# Altium PCB NPU_project.PcbDoc
Units mil, origin at the board's own origin, x right, y up, seen from the top; angles counter-clockwise.
Board outline 4675 x 3440 mil, 2 copper layers (Top Layer, Bottom Layer); 41 components, 47 nets, 171 pads, 58 vias.
Unrouted connection lines stored in the file: 6.
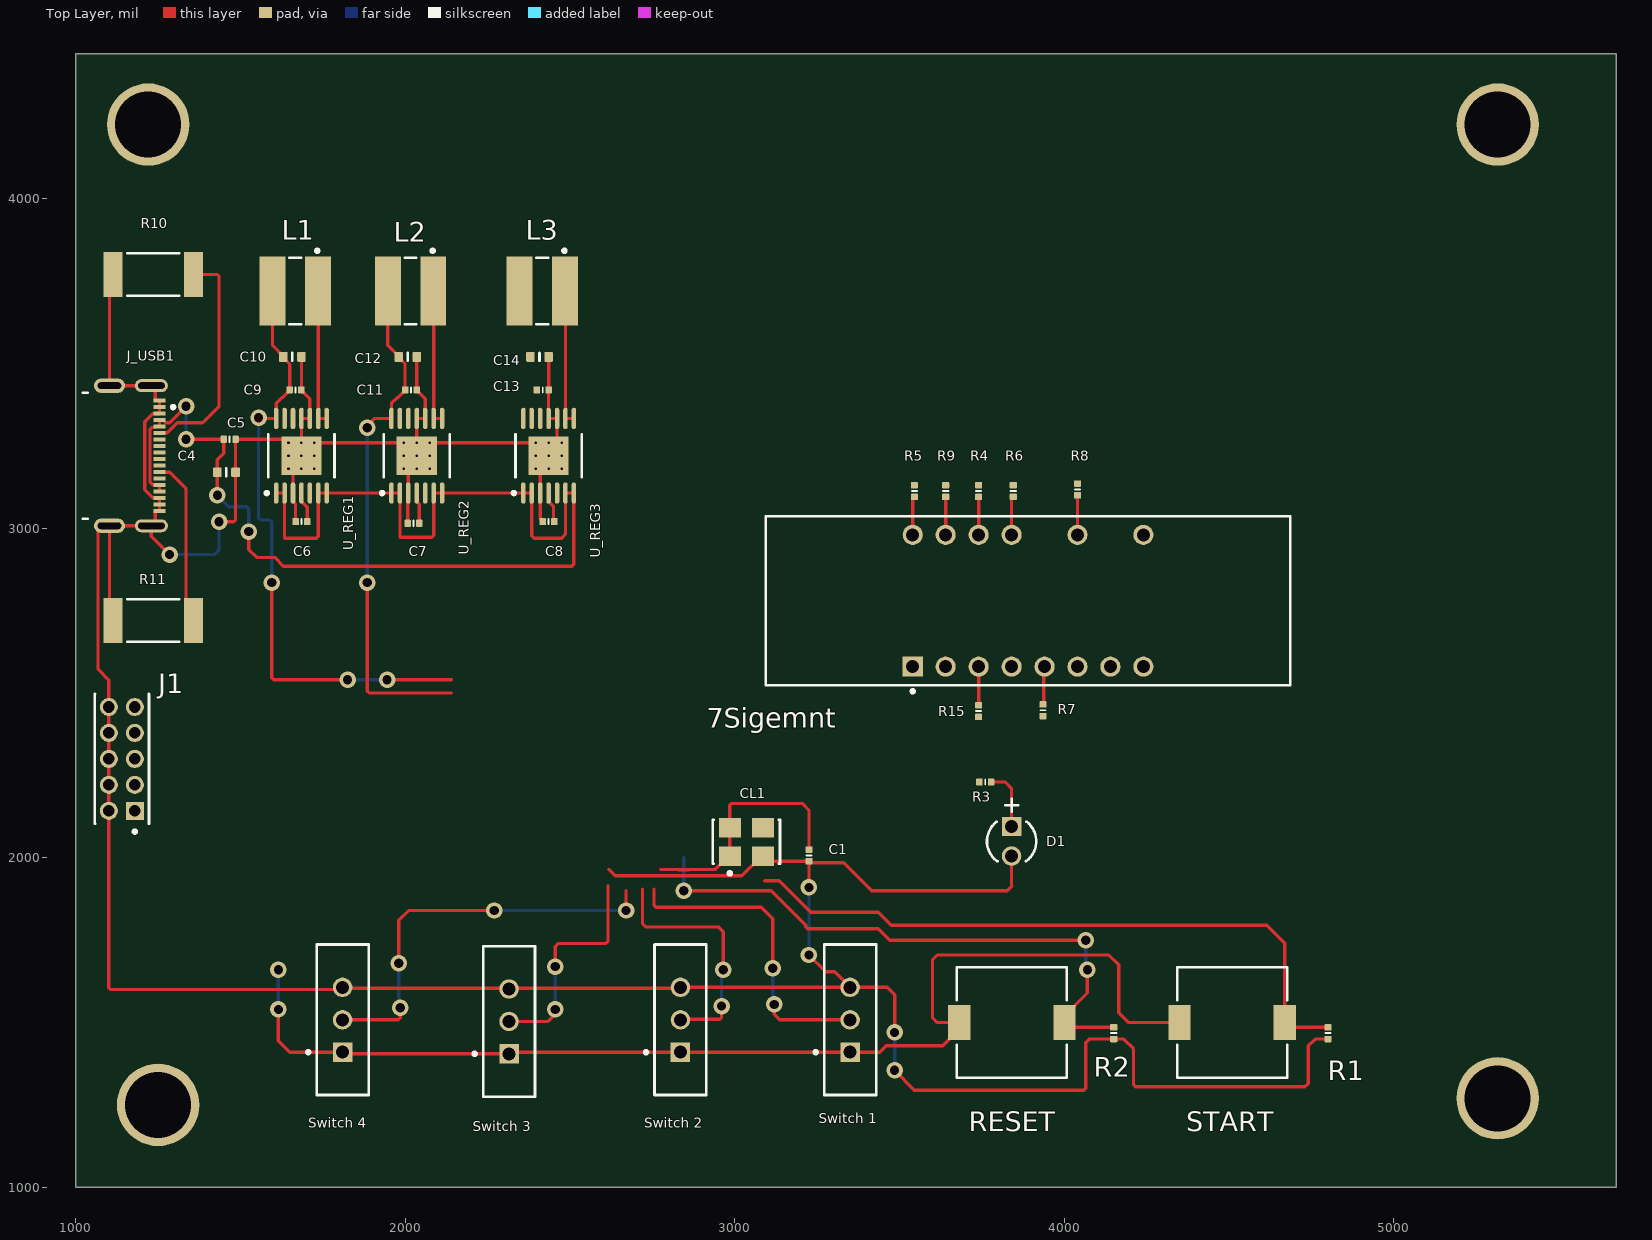
[diagram p0: Top Layer view]
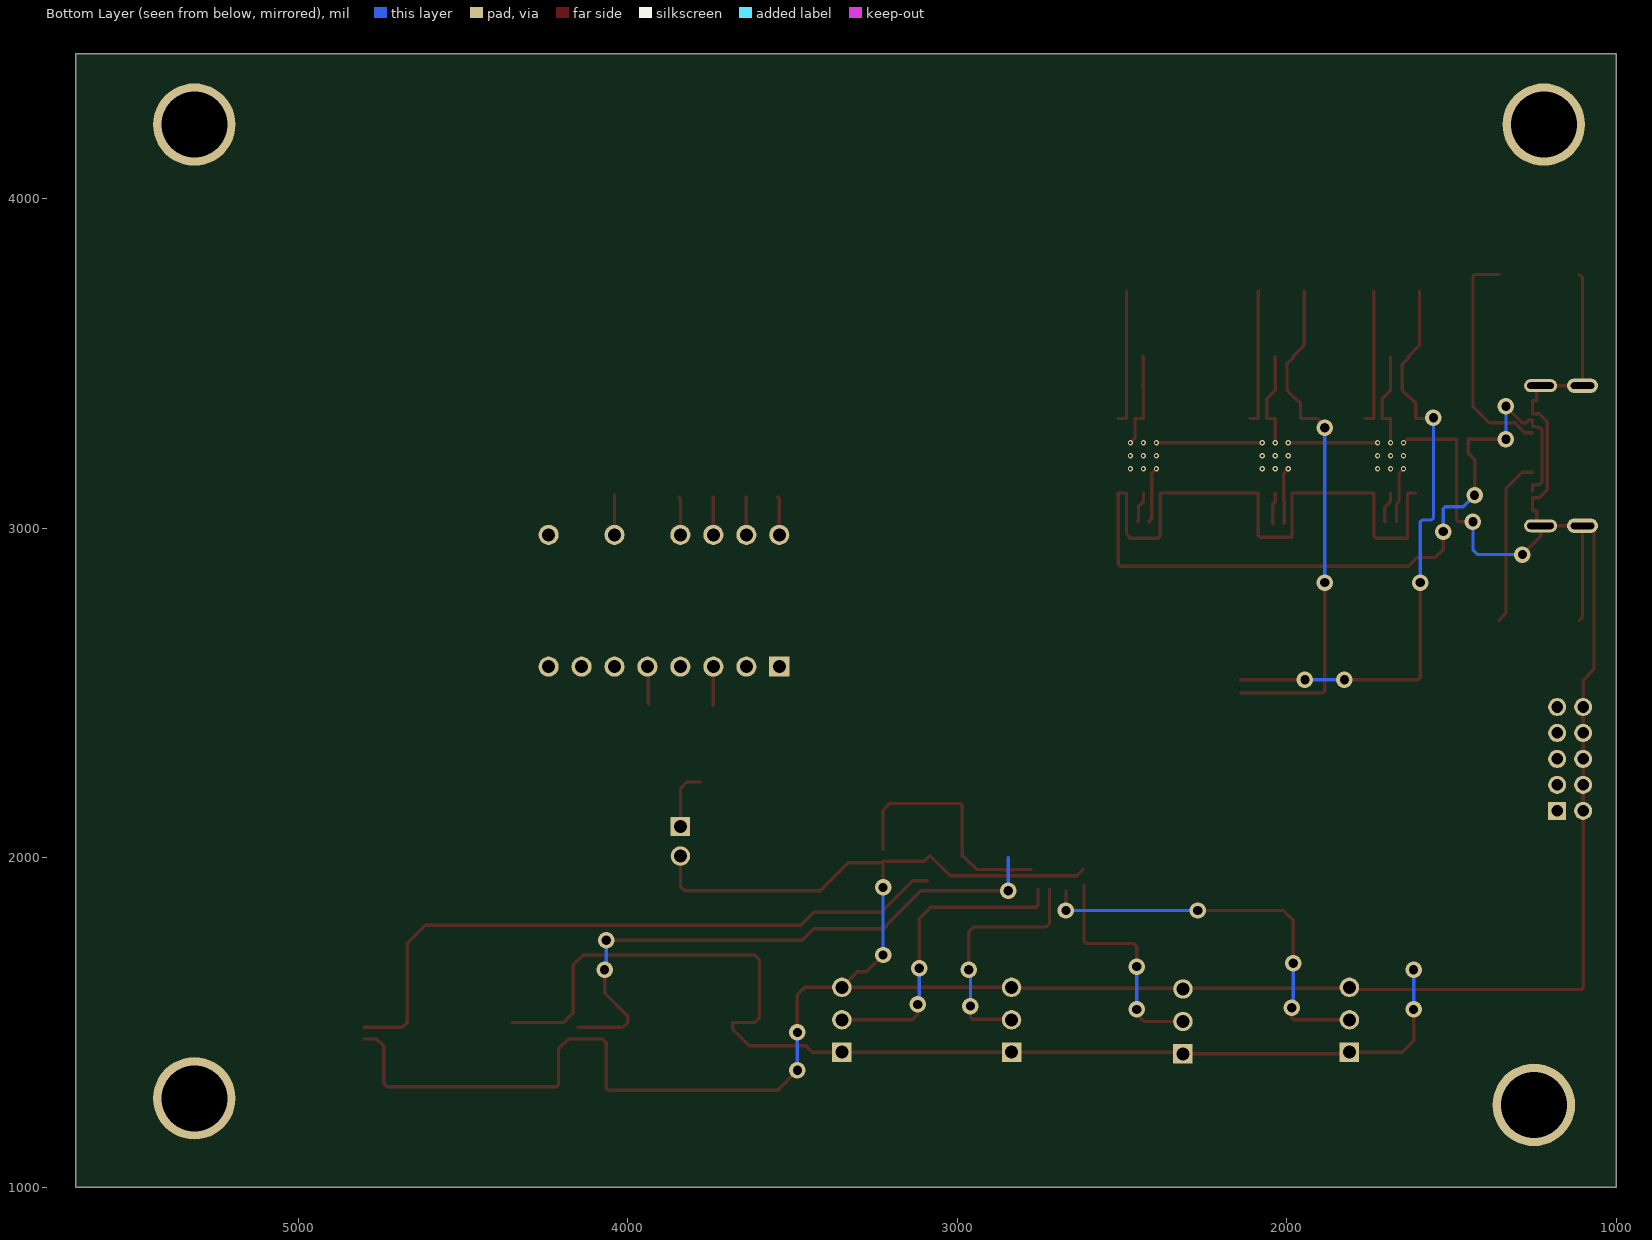
[diagram p1: Bottom Layer view, seen from below]
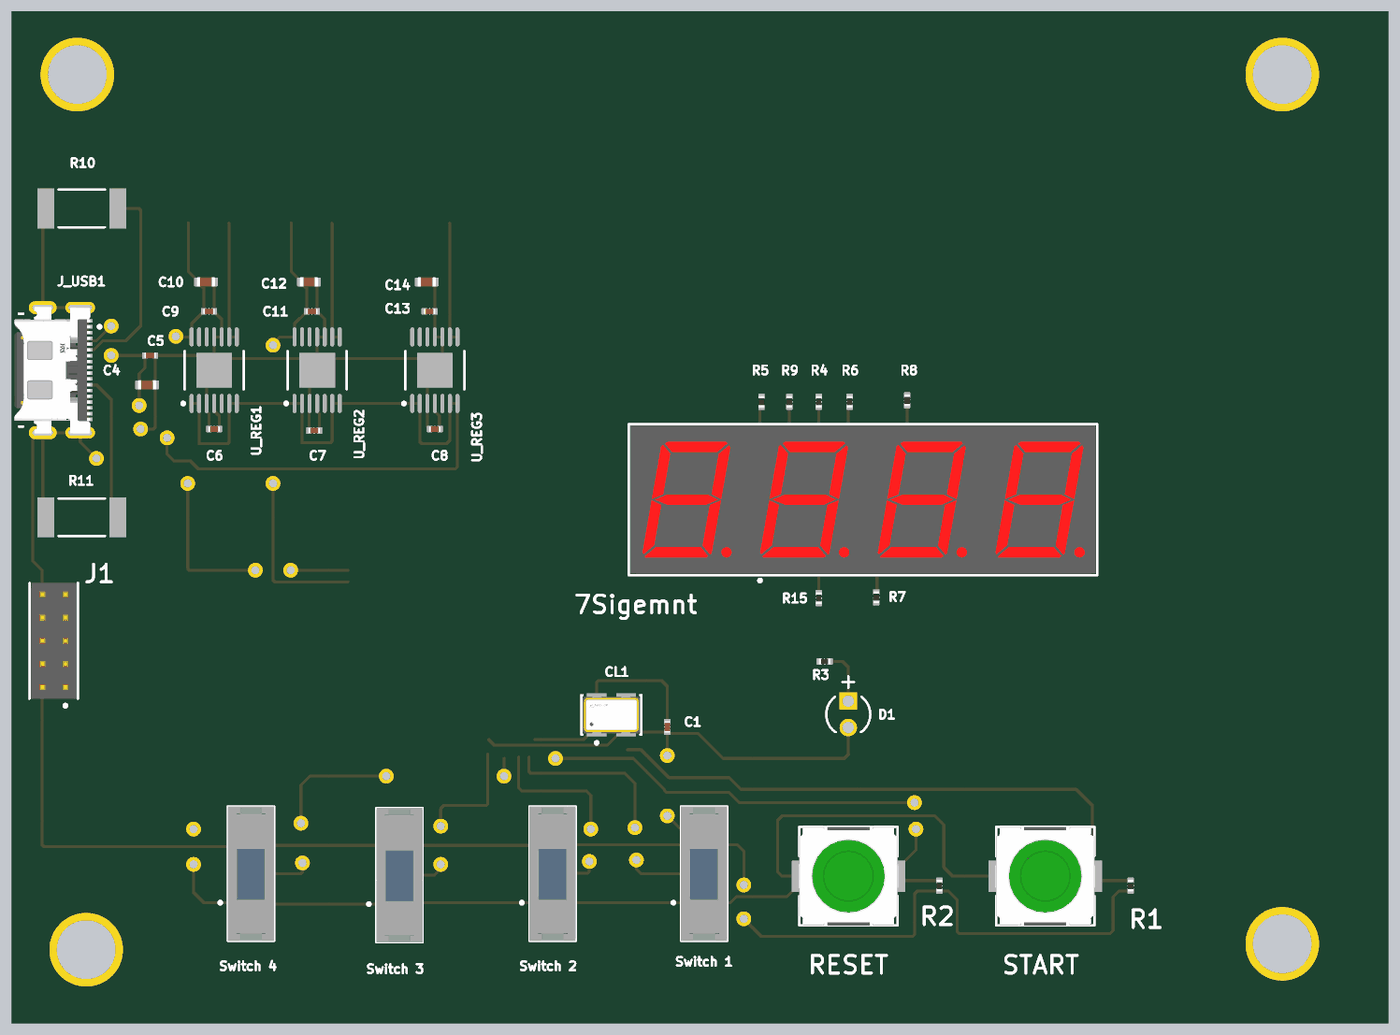
[diagram p2: 3D render of the assembled board from above, using the file's embedded part models]

## Layer stack, top to bottom
Top Solder: solder mask 0.4, Solder Resist, Dk 3.5
Top Layer: signal copper 1.4
Dielectric 1: dielectric 12.6, FR-4, Dk 4.8
Bottom Layer: signal copper 1.4
Bottom Solder: solder mask 0.4, Solder Resist, Dk 3.5

## Board outline
1000,1000 5675,1000 5675,4440 1000,4440

## Design rules (kind name [scope] priority, off if disabled: settings)
Clearance [All] p1: gap=6 ignorepadtopadclearanceinfootprint=TRUE
FanoutControl Fanout_BGA [IsBGA] p1: bgadir=Out bgaviamode=Centered fanoutstyle=BGA fanoutdirection=Alternating viagrid=1 // Fanout_BGA (Default Rule)
MinimumSolderMaskSliver [All] p1 off: minsoldermaskwidth=10
PolygonConnect [All] p1: connectstyle=Relief reliefconductorwidth=10 reliefentries=4 polygonreliefangle="90 Angle" airgapwidth=10
RoutingVias [All] p1: holewidth=28 width=50 viastyle="Through Hole" minholewidth=28 minwidth=50 maxholewidth=28 maxwidth=50
SilkToSolderMaskClearance [IsPad] p1 off: minsilkscreentomaskgap=10 clearancetoexposedcopper=TRUE
SolderMaskExpansion [All] p1: expansion=0 istentingtop=FALSE
SupplyNets "Schematic Supply Nets_4" [InNet('+3V3')] p1: voltage=0.000
SupplyNets "Schematic Supply Nets_3" [InNet('GND')] p2: voltage=0.000
SupplyNets "Schematic Supply Nets_2" [InNet('+1V8')] p3: voltage=0.000
SupplyNets "Schematic Supply Nets_1" [InNet('+1V0')] p4: voltage=0.000
SupplyNets "Schematic Supply Nets" [InNet('+5V_IN')] p5: voltage=0.000
Width [All] p1 off: maxlimit=10 minlimit=10 preferedwidth=10
27 further rules are at their usual default settings.

## Classes and differential pairs
component class PowerSupply: 2 C4 C5 C6 C7 C8 C9 C10 C11 C12 C14 J_USB1 L1 L2 L3 R10 U_REG1 U_REG2 U_REG3
component class JTAG: J1
component class InputOutput: 7Sigemnt D1 R1 R2 R3 R4 R5 R6 R7 R8 R9 R15 RESET START "Switch 1" "Switch 2" "Switch 3" "Switch 4"
component class Clock: C1 CL1

## Components (designator, comment, footprint, x,y, rotation, side; value= is the part's Value field where it differs from the comment)
7Sigemnt "LTC-4627G" FP-LTC-4627G-MFG 3890,2780 r0 top
C1 "Capacitor 100nF +/-20% 50V 0402" CAPC0402(1005)60_L 3225,2007.28 r90 top value=100nF (schematic designator С1)
C4 "Capacitor 10µF +/-20% 10V 0603" CAPC0603(1608)100_L 1457.44,3170 r0 top value=10µF (schematic designator С4)
C5 "Capacitor 100nF +/-20% 50V 0402" CAPC0402(1005)60_L 1467.28,3270 r0 top value=100nF (schematic designator С5)
C6 "Capacitor 100nF +/-20% 50V 0402" CAPC0402(1005)60_L 1685,3020 r0 top value=100nF (schematic designator С6)
C7 "Capacitor 100nF +/-20% 50V 0402" CAPC0402(1005)60_L 2025,3015 r0 top value=100nF (schematic designator С7)
C8 "Capacitor 100nF +/-20% 50V 0402" CAPC0402(1005)60_L 2435,3020 r0 top value=100nF (schematic designator С8)
C9 "Capacitor 100nF +/-20% 50V 0402" CAPC0402(1005)60_L 1667.28,3420 r0 top value=100nF (schematic designator С9)
C10 "Capacitor 10µF +/-20% 10V 0603" CAPC0603(1608)100_L 1657.44,3520 r0 top value=10µF (schematic designator С10)
C11 "Capacitor 100nF +/-20% 50V 0402" CAPC0402(1005)60_L 2017.28,3420 r0 top value=100nF
C12 "Capacitor 10µF +/-20% 10V 0603" CAPC0603(1608)100_L 2007.44,3520 r0 top value=10µF
C13 "Capacitor 100nF +/-20% 50V 0402" CAPC0402(1005)60_L 2417.28,3420 r0 top value=100nF
C14 "Capacitor 10µF +/-20% 10V 0603" CAPC0603(1608)100_L 2407.56,3520 r0 top value=10µF
CL1 "ASFL1-100.000MHZ-EC-T" FP-ASFL1-MFG 3035,2048.31 r0 top (schematic designator Clock)
D1 "304090040" LED-2P-2.28-3MM 3840,2050 r270 top (schematic designator Diode)
J1 "TMM-105-01-L-D" FP-TMM-105-01-L-D-MFG 1140,2300 r90 top
J_USB1 "CX90M-16P" FP-CX90M-16P-MFG 1135,3220 r270 top
L1 "74408941010" WE-SPC_4818 51666.1,-46280 r270 top
L2 "74408941010" WE-SPC_4818 52016.1,-46280 r270 top
L3 "74408941010" WE-SPC_4818 52416.1,-46280 r270 top
R1 "10KR2F" RESC0402(1005)_L 4800,1467.72 r270 top value=10k
R2 "10KR2F" RESC0402(1005)_L 4150,1467.72 r270 top value=10k
R3 "330R2J" RESC0402(1005)_L 3760,2230 r0 top value=330
R4 "330R2J" RESC0402(1005)_L 3740,3112.72 r270 top value=330
R5 "330R2J" RESC0402(1005)_L 3545,3112.72 r270 top value=330
R6 "330R2J" RESC0402(1005)_L 3845,3112.72 r270 top value=330
R7 "330R2J" RESC0402(1005)_L 3935,2447.72 r90 top value=330
R8 "330R2J" RESC0402(1005)_L 4040,3117.72 r270 top value=330
R9 "330R2J" RESC0402(1005)_L 3640,3112.72 r270 top value=330
R10 "5.1K" RESC2512(6432)_M 1235,3770 r180 top
R11 "5.1K" RESC2512(6432)_M 1235,2720 r180 top
R15 "330R2J" RESC0402(1005)_L 3740,2445 r90 top value=330
RESET "SKSTAAE010" FP-SKSTAAE010-MFG 3840.55,1500 r0 top
START "SKSTAAE010" FP-SKSTAAE010-MFG 4509.45,1500 r0 top
"Switch 1" "EG1218" ESWI-EG1218_V 3350,1508.43 r90 top
"Switch 2" "EG1218" ESWI-EG1218_V 2835,1508.43 r90 top
"Switch 3" "EG1218" ESWI-EG1218_V 2315,1503.43 r90 top
"Switch 4" "EG1218" ESWI-EG1218_V 1810,1508.43 r90 top
U_REG1 "LM2852XMXA-1.0/NOPB" MXA14A_N 1685,3220 r90 top
U_REG2 "LM2852XMXA-1.8/NOPB" MXA14A_N 2035,3220 r90 top
U_REG3 "LM2852XMXA-3.3/NOPB" MXA14A_N 2435,3220 r90 top

## Footprints (in the part's own frame and the unit in brackets; to place one, negate y for a bottom-side part, rotate by r counter-clockwise, add the part's x,y. Pads: shape width x height; smd on the part's side, far side on the other; paste and mask are expansions set on the pad)
CAPC0402(1005)60_L [mm] "Chip Capacitor, Body 1.0x0.5mm, Height 0.6mm, IPC High Density"
  rrect25% 0.5x0.55 smd: 1(-0.45,0) 2(0.45,0)
  silkscreen extent 0,-0.2 0,0.2, body extent -0.5,-0.25 0.5,0.25, height 0.6
CAPC0603(1608)100_L [mm] "Chip Capacitor, Body 1.6x0.8mm, Height 1.0mm, IPC High Density"
  rrect25% 0.66x0.76 smd: 1(-0.7,0) 2(0.7,0)
  silkscreen extent 0,-0.3 0,0.3, body extent -0.8,-0.4 0.8,0.4, height 0.95
ESWI-EG1218_V [mm] "THD, 3-Leads, Body 11.6x4mm, Pitch 2.5mm"
  rect 1.5x1.5 hole 1: 1(-2.5,0)
  round 1.5 hole 1: 2(0,0) 3(2.5,0)
  silkscreen extent -5.8,-2 5.8,2.77, body extent -5.8,-2 5.8,2, height 7.4
FP-ASFL1-MFG [mm]
  rect 1.7x1.5 smd paste+0 mask+0: 1(-1.27,-1.1) 2(1.27,-1.1) 3(1.27,1.1) 4(-1.27,1.1)
  silkscreen extent -2.6,-2.54 2.6,1.7, body extent -2.7,-1.95 2.7,1.95, height 0.25
FP-CX90M-16P-MFG [mm]
  rect 0.3x0.9 smd paste+0 mask+0: 1(-4.25,3.025) 2(4.25,3.025) A1(-3.75,3.025) A4(-2.75,3.025) A5(-1.75,3.025) A6(-0.75,3.025) A7(0.75,3.025) A8(1.75,3.025) A9(2.75,3.025) A12(3.75,3.025) B1(3.25,3.025) B4(2.25,3.025) B5(1.25,3.025) B6(0.25,3.025) B7(-0.25,3.025) B8(-1.25,3.025) B9(-2.25,3.025) B12(-3.25,3.025)
  rrect100% 1x2.55 hole 2.05 slot 0.5 at 0 deg paste-2539.97 mask+0: 3(-5.4,2.405) 4(5.4,2.405)
  rrect100% 1.1x2.4 hole 1.8 slot 0.5 at 0 deg paste-2539.97 mask+0: 5(-5.4,-0.825) 6(5.4,-0.825)
  silkscreen extent -4.87,-2.9 4.87,4.2, body extent -6.05,-3.37 6.05,3.78, height 0.25
FP-LTC-4627G-MFG [mm]
  rect 1.55x1.55 hole 1 paste-2539.97 mask+0: 1(-8.89,-5.08)
  round 1.55 hole 1 paste-2539.97 mask+0: 2(-6.35,-5.08) 3(-3.81,-5.08) 4(-1.27,-5.08) 5(1.27,-5.08) 6(3.81,-5.08) 7(6.35,-5.08) 8(8.89,-5.08) 9(8.89,5.08) 11(3.81,5.08) 13(-1.27,5.08) 14(-3.81,5.08) 15(-6.35,5.08) 16(-8.89,5.08)
  silkscreen extent -20.21,-7.1 20.21,6.53, body extent -20.31,-6.63 20.31,6.63, height 0.25
FP-SKSTAAE010-MFG [mm]
  rect 1.7x2.7 smd paste+0 mask+0: 1(-4.05,0) 2(4.05,0)
  silkscreen extent -4.25,-4.25 4.25,4.25, body extent -5,-4.35 5,4.35, height 0.25
FP-TMM-105-01-L-D-MFG [mm]
  rect 1.39x1.39 hole 0.89 paste-2539.97 mask+0: 1(-4,-1)
  round 1.39 hole 0.89 paste-2539.97 mask+0: 2(-4,1) 3(-2,-1) 4(-2,1) 5(0,-1) 6(0,1) 7(2,-1) 8(2,1) 9(4,-1) 10(4,1)
  silkscreen extent -5.72,-2.09 5,2.09, body extent -5.1,-2.13 5.1,2.13, height 0.25
LED-2P-2.28-3MM [mm] "LED, 2-Leads, Dia 3mm, Pitch 2.28mm"
  rect 1.5x1.5 hole 1: 1(-1.14,0)
  round 1.5 hole 1: 2(1.14,0)
  silkscreen extent -3.29,-1.9 1.52,1.9, body extent -1.9,-1.91 1.52,1.91, height 5.3
MXA14A_N [mm] "TSOP, 14-Leads, Body 5x4.4mm, Pitch 0.65mm, Thermal Pad, IPC Medium Density"
  oval 1.65x0.35 smd: 1(-2.875,1.95) 2(-2.875,1.3) 3(-2.875,0.65) 4(-2.875,0) 5(-2.875,-0.65) 6(-2.875,-1.3) 7(-2.875,-1.95) 8(2.875,-1.95) 9(2.875,-1.3) 10(2.875,-0.65) 11(2.875,0) 12(2.875,0.65) 13(2.875,1.3) 14(2.875,1.95)
  rect 3x3.1 smd: 15(0,0)
  silkscreen extent -3,-2.55 1.65,2.8, body extent -2.25,-2.55 2.25,2.55, height 1.1
RESC0402(1005)_L [mm] "Chip Resistor, Body 1.0x0.5mm, IPC High Density"
  rrect25% 0.5x0.55 smd: 1(-0.45,0) 2(0.45,0)
  silkscreen extent 0,-0.2 0,0.2, body extent -0.5,-0.25 0.5,0.25, height 0.3
RESC2512(6432)_M [mm] "Chip Resistor, Body 6.4x3.2mm, IPC Low Density"
  rect 1.45x3.45 smd: 1(-3.1,0) 2(3.1,0)
  silkscreen extent -2,-1.63 2,1.63, body extent -3.25,-1.7 3.25,1.7, height 0.75
WE-SPC_4818 [mm] "SMD Shielded Power Inductor, body 4.8x4.8mm"
  rect 5.3x2 smd: 1(-1270,-1268.25) 2(-1270,-1271.75)
  silkscreen extent -1273.22,-1270.45 -1267.45,-1268.17, body extent -1272.41,-1272.41 -1267.59,-1267.59, height 1.8

## Part data
7Sigemnt: library part CMP-031-00011-1, "7 Seg Numeric LED Display, 4-Character, Green, 10mm", Case/Package=PDIP, Max Operating Temperature=85°C, Min Operating Temperature=-35°C, Mounting Technology="Through Hole", Pins=14
C1 C5 C6 C7 C8 C9 C11 C13: library part CMP-001-00067-3, "Chip Capacitor, 100nF +/-20%, 50V, 0402, Thickness 0.6 mm", Case/Package=0402, Max Operating Temperature=85°C, Min Operating Temperature=-55°C, Tolerance=10%, Voltage Rating=50V, Mounting Technology=SMT, Pins=2
C4 C10 C12 C14: library part CMP-001-00075-4, "Chip Capacitor, 10µF +/-20%, 10V, 0603, Thickness 1 mm", Case/Package=0603, Max Operating Temperature=85°C, Min Operating Temperature=-55°C, Tolerance=10%, Voltage Rating=10V, Mounting Technology=SMT, Pins=2
CL1: library part CMP-031-00009-1, "Oscillator Xo 100MHZ ±50PPM 15PF Hcmos/ttl 60% 3.3V 4-PIN SMD T/r", Case/Package=SMD/SMT, Max Operating Temperature=70°C, Max Supply Voltage=3.63V, Min Operating Temperature=-20°C, Min Supply Voltage=2.97V, Mounting Technology="Surface Mount", Pins=4
D1: library part CMP-007-00006-2, "Green LED, 80 mW, 20 mA, -25 to 85 degC, 2-Pin THD", Manufacturer="Shenzhen CGX", Package Description="2-Pin Through Hole Device, Dia 3 mm, Pitch 2.28 mm", Case/Package=304090040, Datasheet URL=http://datasheet.octopart.com/304090040-Chengguangxing-datasheet-62330655.pdf, Datasheet Version="Rev. 1.0, 09/2014", Manufacturer URL=http://szcgx.com/, Mounting Technology=TH, Package Reference=304090040, RoHS Compliant=Unknown
J1: library part CMP-031-00007-1, "TMM ROHS3Compliant COMMERCIAL 2012 Connector Header -55C~125C 3.2A per Contact 500V 3.94mm", Max Operating Temperature=125°C, Min Operating Temperature=-55°C
J_USB1: library part CMP-031-00012-1, "USB Connector, USB Type C, USB 2.0, Receptacle, 16 Ways, Surface Mount, Right Angle", Max Operating Temperature=85°C, Min Operating Temperature=-40°C, Pins=16
L1 L2 L3: library part CMP-031-00017-1, "Power Choke Shielded Wirewound 1uH 20% 100KHz Ferrite 3A 0.0295Ohm DCR T/R", Max Operating Temperature=125°C, Min Operating Temperature=-40°C, Pins=2
R1 R2: library part CMP-009-00066-2, "10K 0.063W 1% 0402 (1005 Metric)  SMD", Case/Package=0402, Power=63mW, Tolerance=1%, Mounting Technology=SMT, Pins=2
R3 R4 R5 R6 R7 R8 R9 R15: library part CMP-009-00095-2, "330R 0.063W 5% 0402 (1005 Metric)  SMD", Case/Package=0402, Power=63mW, Tolerance=5%, Mounting Technology=SMT, Pins=2
R10 R11: library part CMP-031-00013-1, "Fixed Resistor, Metal Glaze/Thick Film, 1W, 5.1ohm, 500V, 5% +/-Tol, Surface Mount, 2512", Case/Package=2512, Max Operating Temperature=155°C, Min Operating Temperature=-55°C, Mounting Technology="Surface Mount"
RESET START: library part CMP-031-00010-1, "Switch Tactile N.O. SPST Round Button J-Bend 0.05A 16VDC 500000Cycles 4N SMD T/R", Max Operating Temperature=90°C, Min Operating Temperature=-40°C, Mounting Technology="Surface Mount"
"Switch 1" "Switch 2" "Switch 3" "Switch 4": library part CMP-011-00006-2, "Slide Switch, SPDT, 500 V, -20 to 70 degC, 3-Pin THD, RoHS, Bulk", Contact Current Rating=200mA, Manufacturer=E-Switch, Max Operating Temperature=70°C, Min Operating Temperature=-20°C, Operating Force=250gf, Package Description="3-Pin Through Hole Device, Body 11.6 x 4 mm, Pitch 2.5 mm", Package Quantity=1000, Voltage Rating (AC)=30V, Case/Package=EG1218, Contact Finish=Silver, Contact Material=Copper, Contact Plating=Silver, Current Rating=200mA, Datasheet URL=https://www.e-switch.com/system/asset/product_line/data_sheet/119/EG.pdf, Datasheet Version=Oct-15, Manufacturer URL=http://www.e-switch.ch/en/, Mounting Technology=TH, Package Reference=EG1218, Packaging=Bulk, Pins=3, RoHS Compliant=True, Throw Configuration=SPDT, Voltage Rating (DC)=30V
U_REG1: library part CMP-031-00014-1, "2A 500/1500kHz Synchronous Buck Regulator 14-HTSSOP -40 to 125", Case/Package="HTSSOP EP", Max Operating Temperature=125°C, Max Supply Voltage=5.5V, Min Operating Temperature=-40°C, Min Supply Voltage=2.85V, Mounting Technology="Surface Mount", Pins=14
U_REG2: library part CMP-031-00020-1, "2A 500/1500kHz Synchronous Buck Regulator 14-HTSSOP -40 to 125", Case/Package="HTSSOP EP", Max Operating Temperature=125°C, Max Supply Voltage=5.5V, Min Operating Temperature=-40°C, Min Supply Voltage=2.85V, Mounting Technology="Surface Mount", Pins=14
U_REG3: library part CMP-031-00015-1, "2A 500/1500kHz Synchronous Buck Regulator 14-HTSSOP -40 to 125", Case/Package="HTSSOP EP", Max Operating Temperature=125°C, Max Supply Voltage=5.5V, Min Operating Temperature=-40°C, Min Supply Voltage=2.85V, Mounting Technology="Surface Mount", Pins=14

## Free pads (board coordinates)
  round 250 hole 200: 2(1220,4225) 3(1250,1250) 5(5315,1270) 6(5315,4225)

## Via types
v1: diameter 50, hole 28, Top Layer to Bottom Layer, 31 vias
v2: diameter 15.75, hole 7.87, Top Layer to Bottom Layer, 27 vias

## Nets (pads, with @x,y where several pads share a name; then routed paths per layer and width w, separated by ;. In a path a pad name is that pad's centre, name@x,y a point inside that pad or via, vN(x,y) a via of type N, cw(c..) or ccw(c..) an arc to the next point about the centre after c; other vN are vias at no path point)
+1V0: C9.1 C10.1 L1.2 U_REG1.14 | length 1848.6
  Top Layer w10: v1(1555,3335) 1556.81,3333.19 U_REG1.14 1608.23,3378.66 1625.98,3396.42 1626.97,3396.42 1649.57,3419.02 C9.1 1649.57,3498.35 C10.1@1629.88,3518.04 ; v1(1595,2835) 1595,2545.86 1600.86,2540 v1(1825,2540) ; L1.2 1597.2,3554.64 1629.88,3521.96 C10.1 ; v1(1945,2540) 2140,2540
  Bottom Layer w10: v1(1555,3335) 1555,3030.86 1560.86,3025 1589.14,3025 1595,3019.14 1595,2855 1594.14,2854.14 1594.14,2835.86 v1(1595,2835) ; v1(1825,2540) v1(1945,2540)
+1V8: C11.1 C12.1 L2.2 U_REG2.14 | length 1568.6
  Top Layer w10: v1(1885,2835) 1885,2505.86 1890.86,2500 2140,2500 ; v1(1885,3305) 1885,3310 1908.19,3333.19 U_REG2.14 1958.23,3378.66 1975.98,3396.42 1976.97,3396.42 1999.57,3419.02 C11.1 1999.57,3498.35 C12.1@1979.88,3518.04 ; L2.2 1947.2,3554.64 1979.88,3521.96 C12.1
  Bottom Layer w10: v1(1885,2835) v1(1885,3305)
+3V3: "Switch 1.1" "Switch 2.1" "Switch 3.1" "Switch 4.1" C1.2 C13.1 C14.1 CL1.1 CL1.4 J1.1 L3.2 RESET.1 START.1 U_REG3.14 | length 4288.6
  Top Layer w10: v1(1615,1540) 1615,1445 1650,1410 1810,1410 1815,1405 2315,1405 2320,1410 2835,1410 3350,1410 3440,1410 3460,1430 3630.79,1430 3681.1,1480.32 RESET.1 3615,1500 3600,1515 3600,1690 3615,1705 4135,1705 4165,1675 4165,1530 4195,1500 START.1 ; 2775.43,1964.57 2829.52,1964.57 2830.09,1964 2859.91,1964 2860.48,1964.57 2940.63,1964.57 2981.06,2005 CL1.1 CL1.4 2985,2159.14 2990.86,2165 3205,2165 3225,2145 C1.2
  Bottom Layer w10: v1(1615,1540) v1(1615,1660)
+5V_IN: C4.1 C5.1 J_USB1.A4 J_USB1.A9 J_USB1.B4 J_USB1.B9 U_REG1.1 U_REG1.2 U_REG1.6 U_REG1.7 U_REG2.1 U_REG2.2 U_REG2.6 U_REG2.7 U_REG3.1 U_REG3.2 U_REG3.6 U_REG3.7 | length 3924.1
  Top Layer w10: J_USB1.A9 J_USB1.B4 1253.19,3132.32 1233.7,3132.32 1225.38,3140.64 1225.38,3299.36 1231.82,3305.8 1239.5,3305.8 1242.28,3308.58 J_USB1.B9 J_USB1.A4 1265.91,3328.27 1266.81,3327.36 1266.81,3325.86 1272.67,3320 1285,3320 v1(1335,3370) ; v1(1335,3270) C5.1 1449.57,3227.91 1429.88,3208.22 C4.1 1429.88,3109.88 1429.14,3109.14 1429.14,3100.86 v1(1430,3100) ; v1(1525,2990) 1525,2935 1548.75,2911.25 1603.75,2911.25 1630,2885 2505.91,2885 2511.77,2890.86 U_REG3.7 U_REG3.6 2486.18,2981.18 2475,2970 2390.86,2970 2383.82,2977.04 U_REG3.2 U_REG3.1 U_REG2.7 U_REG2.6 2086.18,2978.86 2080.32,2973 1984.64,2973 1983.82,2973.82 U_REG2.2 U_REG2.1 U_REG1.7 U_REG1.6 1736.18,2975.86 1730.32,2970 1635,2970 1633.82,2971.18 U_REG1.2 U_REG1.1
  Bottom Layer w10: v1(1335,3270) v1(1335,3370) ; v1(1430,3100) 1465,3065 1519.14,3065 1525,3059.14 v1(1525,2990)
GND: "Switch 1.3" "Switch 2.3" "Switch 3.3" "Switch 4.3" C1.1 C4.2 C5.2 C6.1 C7.1 C8.1 C9.2 C10.2 C11.2 C12.2 C13.2 C14.2 CL1.2 D1.2 J1.2 J1.4 J1.6 J1.8 J1.10 J_USB1.1 J_USB1.2 J_USB1.3 J_USB1.4 J_USB1.5 J_USB1.6 J_USB1.A1 J_USB1.A12 J_USB1.B1 J_USB1.B12 R1.2 R2.2 R10.2 R11.2 U_REG1.3 U_REG1.10 U_REG1.11 U_REG1.15 U_REG2.3 U_REG2.10 U_REG2.11 U_REG2.15 U_REG3.3 U_REG3.10 U_REG3.11 U_REG3.15 | length 11831.1
  Top Layer w10: J_USB1.6@1067.95,3000 1067.95,2572.05 1100.63,2539.37 J1.10 J1.8 J1.6 J1.4 J1.2 1100.63,1605.86 1106.49,1600 1803.15,1600 1810,1606.85 1812.5,1604.35 2312.5,1604.35 2315,1601.85 2317.5,1604.35 2832.5,1604.35 2835,1606.85 3350,1606.85 ; R11.2 1102.52,2730.43 J_USB1.6 J_USB1.4 ; R10.2 1102.52,3759.57 J_USB1.5 J_USB1.3 1241.38,3420.91 1241.38,3388.23 1242.28,3387.32 J_USB1.1 J_USB1.A1 J_USB1.B12 1253.19,3347.05 1233.7,3347.05 1209.38,3322.73 1209.38,3117.27 1233.7,3092.95 1253.19,3092.95 J_USB1.B1 J_USB1.A12 J_USB1.2 1242.28,3052.68 1241.38,3051.77 1241.38,3019.09 J_USB1.4 ; v1(1285,2920) 1229.68,2975.32 J_USB1.4 ; v1(1435,3020) 1479.14,3020 1485,3025.86 C4.2 C5.2 1635,3270 v2(1645.63,3259.37) ; v2(1645.63,3180.63) 1659.41,3166.85 U_REG1.3 1659.41,3080.2 1667.28,3072.32 C6.1 ; v2(1685,3259.37) U_REG1.11 U_REG1.10 1710.59,3393.43 C9.2@1685,3419.02 ; C9.2 C10.2 ; v2(1724.37,3259.37) v2(1995.63,3259.37) ; v2(1995.63,3180.63) 2009.41,3166.85 U_REG2.3 2009.41,3080.2 2007.28,3078.07 C7.1 ; v2(2035,3259.37) U_REG2.11 U_REG2.10 2060.59,3393.43 C11.2@2035,3419.02 ; C11.2 C12.2 ; v2(2074.37,3259.37) v2(2395.63,3259.37) ; v2(2395.63,3180.63) 2409.41,3166.85 U_REG3.3 2409.41,3028.86 2417.28,3020.98 C8.1 ; C14.2 2435.06,3519.94 2435.06,3420.06 C13.2 U_REG3.11 U_REG3.10 2460.59,3273.15 v2(2474.37,3259.37) ; 2617.95,1964.57 2636.95,1945.57 3021.63,1945.57 3081.06,2005 CL1.2 3100.43,1989.57 C1.1 ; v1(3225,1705) 3275.91,1654.09 3302.76,1654.09 3350,1606.85 ; v1(3225,1910) 3225,1985 C1.1 ; v1(3485,1355) 3545,1295 4059.14,1295 4065,1300.86 4065,1439.14 4075.86,1450 R2.2 4180,1450 4210,1420 4210,1310.86 4215.86,1305 4730,1305 4740,1315 4740,1429.14 4760.86,1450 R1.2 ; v1(3485,1470) 3485,1585 3463.15,1606.85 3350,1606.85 ; D1.2 3840,1915 3840.86,1914.14 3826.72,1900 3415,1900 3330,1985 3229.57,1985 C1.1
  Bottom Layer w10: v1(1285,2920) 1420,2920 1435,2935 v1(1435,3020) ; v1(3225,1705) v1(3225,1910) ; v1(3485,1355) 3485,1360 3485.86,1360.86 3485.86,1369.14 3485,1370 v1(3485,1470)
  other v2: 1685,3180.63 1724.37,3180.63 2035,3180.63 2074.37,3180.63 2435,3180.63 2474.37,3180.63 1645.63,3220 1685,3220 1724.37,3220 1995.63,3220 2035,3220 2074.37,3220 2395.63,3220 2435,3220 2474.37,3220 2435,3259.37
JTAG_TCK: J1.3
JTAG_TDI: J1.7
JTAG_TDO: J1.9
JTAG_TMS: J1.5
Net7Sigemnt_1: 7Sigemnt.1
Net7Sigemnt_2: 7Sigemnt.2
Net7Sigemnt_3: 7Sigemnt.3 R15.2 | length 117.3
  Top Layer w10: R15.2 7Sigemnt.3
Net7Sigemnt_5: 7Sigemnt.5 R7.2 | length 116.6
  Top Layer w10: R7.2 3937.5,2467.93 3937.5,2577.5 7Sigemnt.5
Net7Sigemnt_6: 7Sigemnt.6
Net7Sigemnt_8: 7Sigemnt.8
Net7Sigemnt_11: 7Sigemnt.11 R8.2 | length 120
  Top Layer w10: 7Sigemnt.11 R8.2
Net7Sigemnt_13: 7Sigemnt.13 R6.2 | length 117.2
  Top Layer w10: 7Sigemnt.13 3840,3090.16 3844.84,3095 R6.2
Net7Sigemnt_14: 7Sigemnt.14 R4.2 | length 115
  Top Layer w10: 7Sigemnt.14 R4.2
Net7Sigemnt_15: 7Sigemnt.15 R9.2 | length 115
  Top Layer w10: 7Sigemnt.15 R9.2
Net7Sigemnt_16: 7Sigemnt.16 R5.2 | length 117.2
  Top Layer w10: 7Sigemnt.16 3540,3090.16 3544.84,3095 R5.2
NetClock_3: CL1.3
NetDiode_1: D1.1 R3.2 | length 185.7
  Top Layer w10: R3.2 3820,2230 3840,2210 D1.1
NetJ_USB1_A5: J_USB1.A5 R10.1 | length 689
  Top Layer w10: J_USB1.A5 1255,3289.8 1277.43,3289.8 1307.63,3320 1385,3320 1435,3370 1435,3764.14 1429.14,3770 R10.1
NetJ_USB1_B5: J_USB1.B5 R11.1 | length 511.1
  Top Layer w10: J_USB1.B5 1255,3169.88 1285.12,3169.88 1335,3120 1335,2742.05 R11.1
NetL1_1: L1.1 U_REG1.8 U_REG1.9 | length 412.9
  Top Layer w10: L1.1 1736.18,3718.82 U_REG1.9 U_REG1.8
NetL2_1: L2.1 U_REG2.8 U_REG2.9 | length 412.9
  Top Layer w10: L2.1 2086.18,3718.82 U_REG2.9 U_REG2.8
NetL3_1: L3.1 U_REG3.8 U_REG3.9 | length 412.9
  Top Layer w10: L3.1 2486.18,3718.82 U_REG3.9 U_REG3.8
NetR1_1: R1.1 START.2 | length 2035.4
  Top Layer w10: 3090,1930 3135,1930 3230,1835 3435,1835 3475,1795 4615,1795 4668.9,1741.1 START.2 4683.46,1485.43 R1.1
NetR2_1: R2.1 RESET.2 | length 1821.7
  Top Layer w10: v1(2845,1900) 3110,1900 3215,1795 3215,1790.86 3220.86,1785 3435,1785 3470,1750 v1(4065,1750) ; v1(4070,1660) 4070,1589.68 4000,1519.68 RESET.2 4014.57,1485.43 R2.1
  Bottom Layer w10: v1(2845,1900) 2845,2000 ; v1(4065,1750) 4065,1665 v1(4070,1660)
NetR3_1: R3.1
NetR4_1: R4.1
NetR5_1: R5.1
NetR6_1: R6.1
NetR7_1: R7.1
NetR8_1: R8.1
NetR9_1: R9.1
NetR12_2: 
NetR13_2: 
NetR14_2: 
NetR15_1: R15.1
"NetSwitch 1_2": "Switch 1.2" | length 955
  Top Layer w10: 2755,1905 2755,1855.86 2760.86,1850 3080,1850 3115,1815 v1(3115,1665) ; v1(3120,1555) 3120,1525 3136.57,1508.43 3350,1508.43
  Bottom Layer w10: v1(3115,1665) 3115,1560 v1(3120,1555)
"NetSwitch 2_2": "Switch 2.2" | length 749.6
  Top Layer w10: 2720,1905 2720,1800 2730,1790 2950,1790 2965,1775 v1(2965,1660) ; 2835,1508.43 2836.57,1510 2954.14,1510 2960,1515.86 v1(2960,1550)
  Bottom Layer w10: v1(2960,1550) 2960,1655 v1(2965,1660)
"NetSwitch 3_2": "Switch 3.2" | length 690.4
  Top Layer w10: 2315,1503.43 2433.43,1503.43 2455.86,1525.86 2455.86,1534.14 2455,1535 v1(2455,1540) ; v1(2455,1670) 2455,1730 2465,1740 2609.14,1740 2615,1745.86 2615,1915
  Bottom Layer w10: v1(2455,1540) v1(2455,1670)
"NetSwitch 4_2": "Switch 4.2" | length 1237.6
  Top Layer w10: 1810,1508.43 1979.14,1508.43 1985,1514.28 v1(1985,1545) ; v1(1980,1680) 1980,1810 2010,1840 v1(2270,1840) ; v1(2670,1840) 2670,1900
  Bottom Layer w10: v1(1980,1680) 1980,1550 v1(1985,1545) ; v1(2270,1840) v1(2670,1840)
"NetU_REG1 _4": C6.2 U_REG1.4 | length 94.1
  Top Layer w10: U_REG1.4 1685,3081.22 1702.72,3063.5 C6.2
NetU_REG2_4: C7.2 U_REG2.4 | length 95
  Top Layer w10: U_REG2.4 2035,3080.2 2042.72,3072.48 C7.2
NetU_REG3_4: C8.2 U_REG3.4 | length 94.1
  Top Layer w10: U_REG3.4 2435,3080.26 2450,3065.26 2450,3022.72 C8.2
pads on no net: 7Sigemnt.4 7Sigemnt.7 7Sigemnt.9 J_USB1.A6 J_USB1.A7 J_USB1.A8 J_USB1.B6 J_USB1.B7 J_USB1.B8 U_REG1.5 U_REG1.12 U_REG1.13 U_REG2.5 U_REG2.12 U_REG2.13 U_REG3.5 U_REG3.12 U_REG3.13